# Altium PCB 【tb7152677】dengyuxiang v3.0.PcbDoc (part 1 of 2)
Units mm, origin at the board's own origin, x right, y up, seen from the top; angles counter-clockwise.
Board outline 152.4 x 101.6 mm, 2 copper layers (Top Layer, Bottom Layer); 58 components, 46 nets, 215 pads, 61 vias.
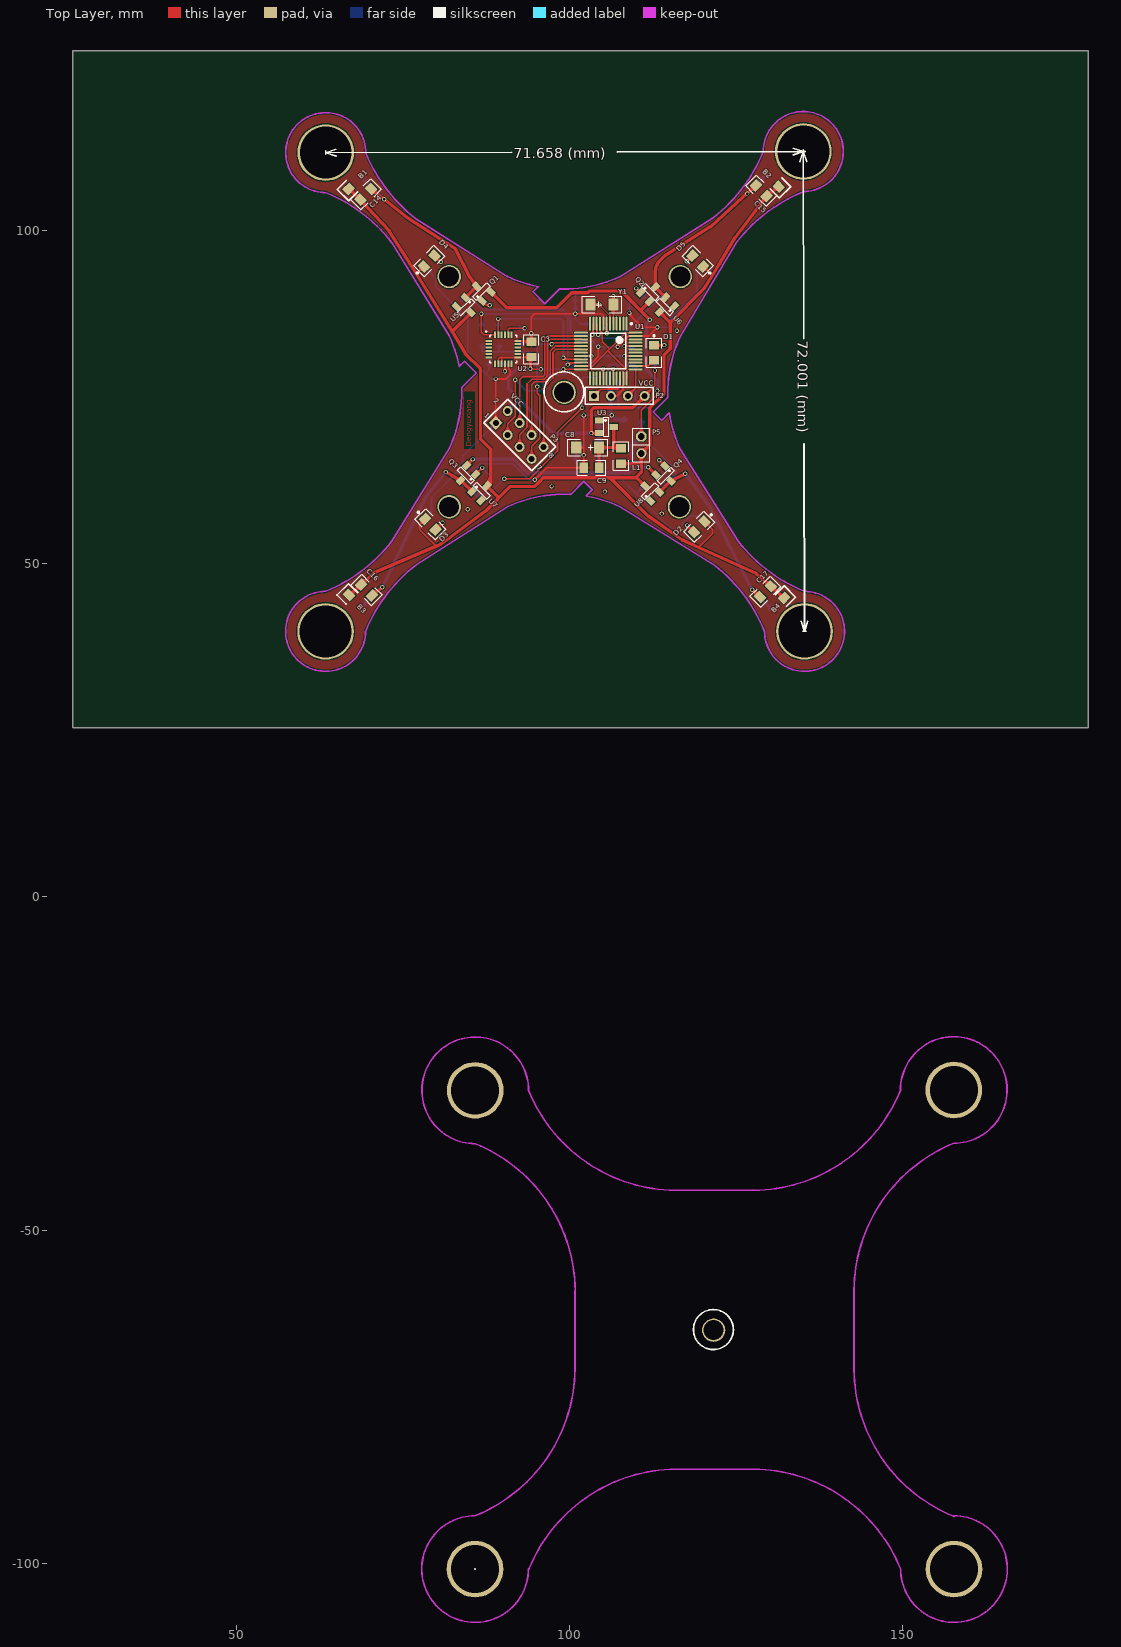
[diagram p0: Top Layer view]
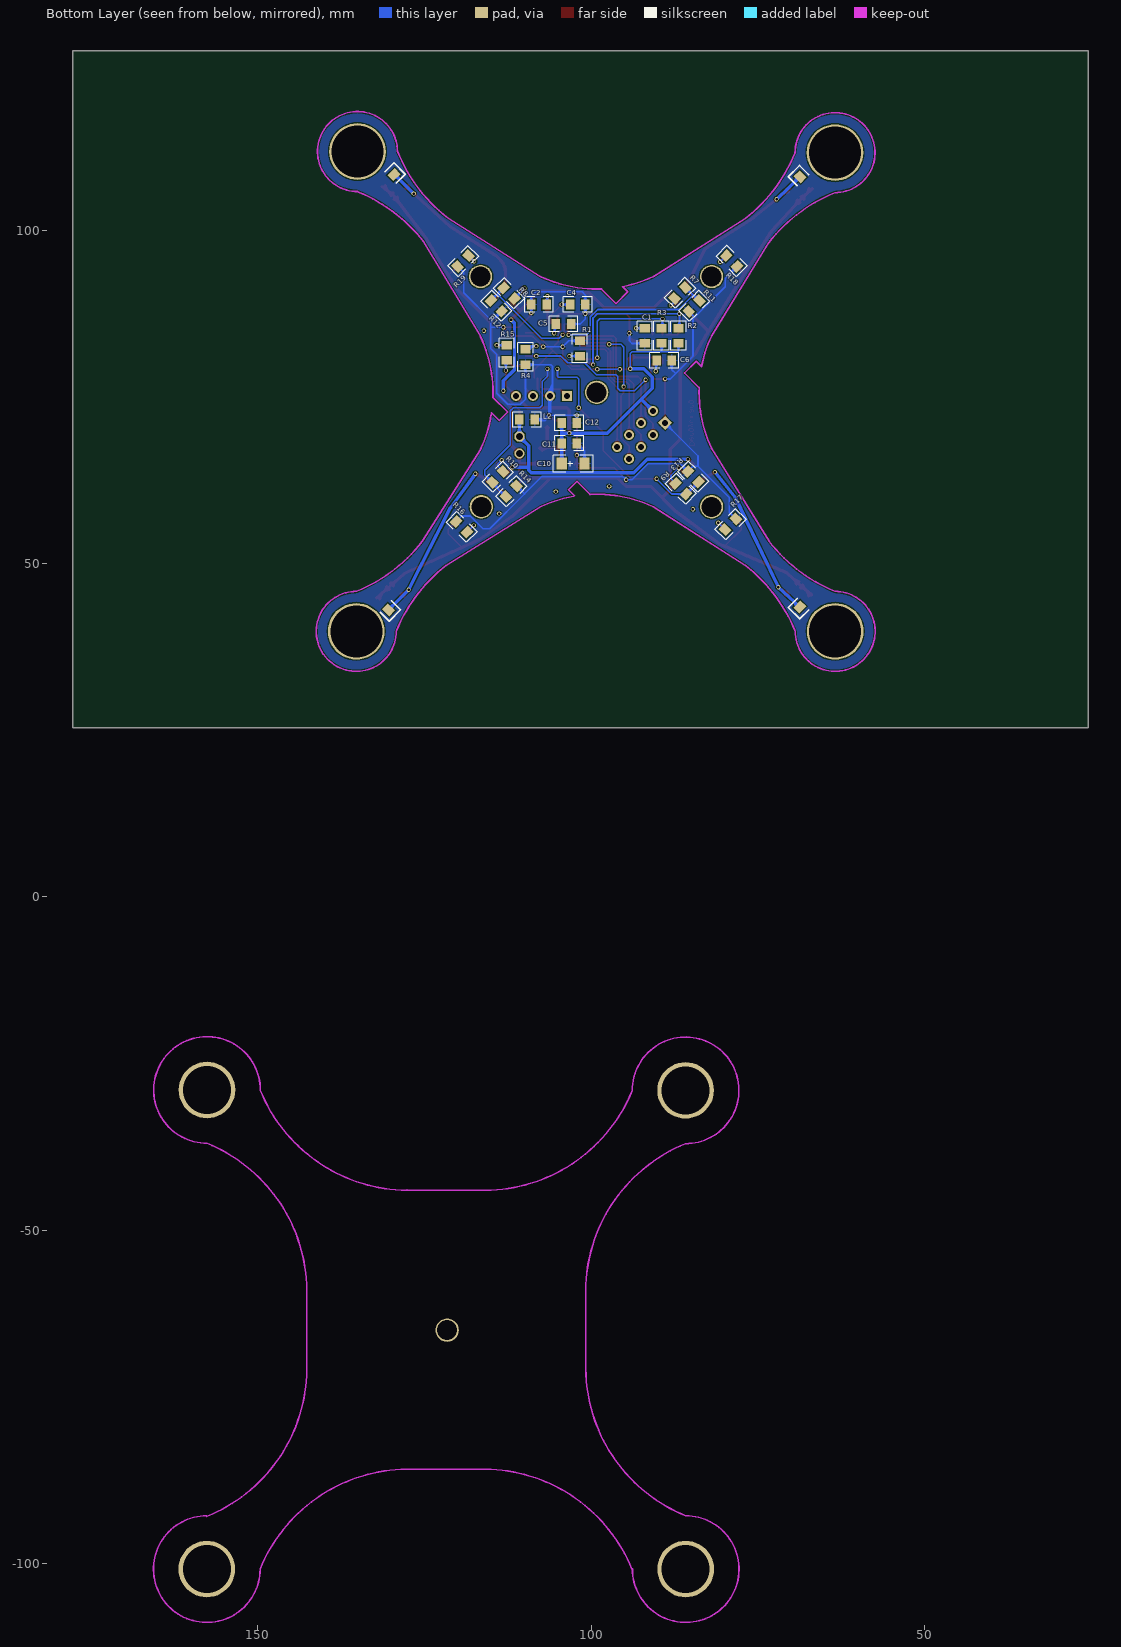
[diagram p1: Bottom Layer view, seen from below]

## Layer stack, top to bottom
Top Layer: signal copper 0.0356
Dielectric: dielectric 0.32, FR-4, Dk 4.8
Bottom Layer: signal copper 0.0356

## Board outline
25.4,25.4 177.8,25.4 177.8,127 25.4,127

## Design rules (kind name [scope] priority, off if disabled: settings)
Clearance Clearance_1 [OnLayer('Keep-Out Layer')] p1 off: gap=0.508
Clearance [All] p2: gap=0.152
ComponentClearance [All] p1: gap=0 collisioncheckmode=3 verticalgap=0 showdistances=FALSE
MinimumSolderMaskSliver [All] p1: minsoldermaskwidth=0.102
PolygonConnect [All] p1: connectstyle=Relief reliefconductorwidth=0.254 reliefentries=4 polygonreliefangle="90 Angle"
RoutingVias [All] p1: holewidth=0.711 width=1.27 viastyle="Through Hole" minholewidth=0.711 minwidth=1.27 maxholewidth=0.711 maxwidth=1.27
SilkToSilkClearance [All] p1: silktosilkclearance=0
SilkscreenOverComponentPads [All] p1: minsilkscreentomaskgap=0.102
SolderMaskExpansion [All] p1: expansion=0.102
Width [All] p1: maxlimit=2.54 minlimit=0.254 preferedwidth=0.254 minimp=50.000000 maximp=50.000000 favimp=50.000000
24 further rules are at their usual default settings.

## Components (designator, comment, footprint, x,y, rotation, side; value= is the part's Value field where it differs from the comment)
B1 "Motor" 0805_Motor 67.818,107.061 r45 top
B2 "Motor" 0805_Motor 130.556,107.569 r135 top
B3 "Motor" 0805_Motor 67.691,44.323 r315 top
B4 "Motor" 0805_Motor 131.191,44.069 r225 top
C1 "Cap" 0805_c 91.948,83.058 r90 bottom
C2 "Cap" 0805_c 106.68,88.9 r0 bottom
C3 "Cap" 0805_c 94.234,81.026 r90 top
C4 "Cap" 0805_c 103.124,88.9 r180 bottom
C5 "Cap" 0805_c 105.283,85.979 r180 bottom
C6 "Cap" 0805_c 90.17,80.518 r180 bottom
C8 "100uF" 1206_c 104.394,67.437 r180 top
C9 "Cap" 0805_c 104.394,64.389 r180 top
C10 "100uF" 1206_c 104.394,65.024 r180 bottom
C11 "Cap" 0805_c 104.394,68.072 r180 bottom
C12 "Cap" 0805_c 104.394,71.12 r180 bottom
C14 "104" 0805_c 68.58,104.648 r45 top
C15 "104" 0805_c 129.54,105.156 r135 top
C16 "104" 0805_c 68.707,46.863 r315 top
C17 "104" 0805_c 130.175,46.609 r225 top
D1 "LED" 0805_led 112.649,82.804 r270 top
D2 "LED" 0805_led 120.23,56.344 r225 top
D3 "LED" 0805_led 78.276,56.73 r315 top
D4 "LED" 0805_led 78.105,94.615 r45 top
D5 "LED" 0805_led 120.015,94.615 r135 top
L1 "Inductor" 0805_r 107.696,65.024 r90 top
L2 "Inductor" 0805_r 110.744,71.628 r180 bottom
P2 "Header 4" HDR1X4 103.632,75.184 r0 top
P3 "Header 4X2" HDR2X4 88.9,71.12 r315 top
P5 "Header 2" sip_2 110.744,69.088 r270 top
Q1 "SI2302" sot23 86.868,89.408 r45 top
Q2 "SI2302" sot23 110.617,90.678 r315 top
Q3 "SI2302" sot23 85.852,63.373 r135 top
Q4 "SI2302" sot23 114.3,64.643 r225 top
R1 "Res2" 0805_r 101.691,81.165 r90 bottom
R2 "Res2" 0805_r 86.868,85.334 r270 bottom
R3 "Res2" 0805_r 89.408,85.334 r270 bottom
R4 "Res2" 0805_r 109.855,79.883 r90 bottom
R7 "Res2" 0805_r 85.852,91.44 r315 bottom
R8 "Res2" 0805_r 113.116,91.399 r225 bottom
R9 "Res2" 0805_r 85.725,60.452 r45 bottom
R10 "Res2" 0805_r 114.808,62.23 r135 bottom
R11 "Res2" 0805_r 85.344,87.884 r135 bottom
R12 "Res2" 0805_r 113.411,87.884 r45 bottom
R13 "Res2" 0805_r 85.476,63.874 r225 bottom
R14 "Res2" 0805_r 111.166,61.681 r315 bottom
R15 "Res2" 0805_r 112.649,82.804 r270 bottom
R16 "RES2" 0805_r 120.228,56.347 r225 bottom
R17 "RES2" 0805_r 78.273,56.728 r315 bottom
R18 "RES2" 0805_r 78.105,94.615 r45 bottom
R19 "RES2" 0805_r 120.015,94.615 r135 bottom
U1 "STM32F101C6T6" LQFP48_M 105.791,81.915 r270 top
U2 "mpu6050" "24 Lead QFN" 87.63,80.518 r0 top
U3 "ME6206A33" sot23 104.394,71.501 r270 top
U5 "BAT54C" sot23 84.328,89.916 r225 top
U6 "BAT54C" sot23 115.697,88.646 r135 top
U7 "BAT54C" sot23 85.344,60.833 r315 top
U8 "BAT54C" sot23 112.141,59.436 r45 top
Y1 "XTAL" 1206_c 103.124,88.9 r0 top

## Footprints (in the part's own frame and the unit in brackets; to place one, negate y for a bottom-side part, rotate by r counter-clockwise, add the part's x,y. Pads: shape width x height; smd on the part's side, far side on the other; paste and mask are expansions set on the pad)
"24 Lead QFN" [mm]
  rect 0.95x0.3 smd: 1(0.228,2.932) 2(0.228,2.432) 3(0.228,1.932) 4(0.228,1.432) 5(0.228,0.932) 6(0.228,0.432) 13(4.578,0.432) 14(4.578,0.932) 15(4.578,1.432) 16(4.578,1.932) 17(4.578,2.432) 18(4.578,2.932)
  rect 0.3x0.95 smd: 7(1.153,-0.493) 8(1.653,-0.493) 9(2.153,-0.493) 10(2.653,-0.493) 11(3.153,-0.493) 12(3.653,-0.493) 19(3.653,3.857) 20(3.153,3.857) 21(2.653,3.857) 22(2.153,3.857) 23(1.653,3.857) 24(1.153,3.857)
  silkscreen extent -0.23,-0.37 4.45,4.37, body extent 0.38,-0.38 4.44,3.68, height 0.89
0805_c [mil]
  rect 50x60 smd: 1(-0.19,-0.27) 2(89.81,-0.27)
  silkscreen extent -40,-45 130,45
0805_led [mil]
  rect 50x60 smd: 1(-0.19,0.11) 2(89.81,0.11)
  silkscreen extent -60,-45 130,45
0805_Motor [mil]
  rect 60x50 smd: 1(-50,5)
  rect 60x50 smd far side: 2(50,5)
  silkscreen extent -100,-45 -25,50
0805_r [mil]
  rect 50x60 smd: 1(-0.19,-0.27) 2(89.81,-0.27)
  silkscreen extent -40,-45 130,45
1206_c [mil]
  rect 60x70 smd: 1(-0.19,-0.27) 2(134.81,-0.27)
  silkscreen extent -50,-50 185,50
HDR1X4 [mm] "Connector; Header; 4 Position"
  rect 1.5x1.5 hole 0.9: 1(0,0)
  round 1.5 hole 0.9: 2(2.54,0) 3(5.08,0) 4(7.62,0)
  silkscreen extent -1.27,-1.27 8.89,1.27
HDR2X4 [mm] "Connector; Header; 4x2 Position"
  rect 1.5x1.5 hole 0.9: 1(0,0)
  round 1.5 hole 0.9: 2(0,2.54) 3(2.54,0) 4(2.54,2.54) 5(5.08,0) 6(5.08,2.54) 7(7.62,0) 8(7.62,2.54)
  silkscreen extent -1.27,-1.27 8.89,3.81
LQFP48_M [mm] "Thin QFP, 48-Leads, Body 7x7mm, Pitch 0.5mm, IPC Low De"
  oval 2.1x0.3 smd: 1(-4.1,2.75) 2(-4.1,2.25) 3(-4.1,1.75) 4(-4.1,1.25) 5(-4.1,0.75) 6(-4.1,0.25) 7(-4.1,-0.25) 8(-4.1,-0.75) 9(-4.1,-1.25) 10(-4.1,-1.75) 11(-4.1,-2.25) 12(-4.1,-2.75) 25(4.1,-2.75) 26(4.1,-2.25) 27(4.1,-1.75) 28(4.1,-1.25) 29(4.1,-0.75) 30(4.1,-0.25) 31(4.1,0.25) 32(4.1,0.75) 33(4.1,1.25) 34(4.1,1.75) 35(4.1,2.25) 36(4.1,2.75)
  oval 0.3x2.1 smd: 13(-2.75,-4.1) 14(-2.25,-4.1) 15(-1.75,-4.1) 16(-1.25,-4.1) 17(-0.75,-4.1) 18(-0.25,-4.1) 19(0.25,-4.1) 20(0.75,-4.1) 21(1.25,-4.1) 22(1.75,-4.1) 23(2.25,-4.1) 24(2.75,-4.1) 37(2.75,4.1) 38(2.25,4.1) 39(1.75,4.1) 40(1.25,4.1) 41(0.75,4.1) 42(0.25,4.1) 43(-0.25,4.1) 44(-0.75,4.1) 45(-1.25,4.1) 46(-1.75,4.1) 47(-2.25,4.1) 48(-2.75,4.1)
  silkscreen extent -4.22,-2.65 2.65,3.57, body extent -3.5,-3.5 3.5,3.5, height 1.6
sip_2 [mil]
  oct 60x60 hole 40: 1(0,0)
  round 60 hole 40: 2(100,0)
  silkscreen extent -50,-50 150,50
sot23 [mil]
  rect 36x50 smd: 1(-0.2,0) 2(74.8,0) 3(37.8,86)
  silkscreen extent -20,28 94,58

## Part data
B1 B2 B3 B4: "Motor, Genera"
C1 C2 C3 C4 C5 C6 C9 C11 C12: "Capacitor"
C8 C10: library part "CAPACITOR POL", "Capacitor"
C14 C15 C16 C17: library part CAP, "Capacitor"
D1: library part LED0, "Typical INFRARED GaAs LED"
P2: "Header, 4-Pin"
P3: "Header, 4-Pin, Dual row"
P5: "Header, 2-Pin"
R1 R2 R3 R4 R7 R8 R9 R10 R11 R12 R13 R14 R15: "Resistor"
U1: "STM32 ARM-based 32-bit MCU with 32 Kbytes Flash, 48-pin LQFP, Industrial Temperature"
U2: library part m
U3: library part ME6206Axx
Y1: "Crystal Oscillator"

## Free pads (board coordinates)
  round 8.5 hole 7.8: 1(63.388,111.688) 2(135.046,111.853) 3(63.365,39.853) 4(135.23,39.853)
  round 8.5 hole 7.2: 1(85.817,-29.028) 2(157.63,-28.965) 3(85.794,-100.863) 4(157.658,-100.863)
  round 3.5 hole 3: 5(99.162,75.711) 5(121.59,-65.005) 6(81.915,93.091) 7(116.586,93.091) 8(81.915,58.547) 9(116.459,58.547)

## Via types
v1: diameter 0.635, hole 0.381, Top Layer to Bottom Layer, 61 vias

## Nets (pads, with @x,y where several pads share a name; then routed paths per layer and width w, separated by ;. In a path a pad name is that pad's centre, name@x,y a point inside that pad or via, vN(x,y) a via of type N, cw(c..) or ccw(c..) an arc to the next point about the centre after c; other vN are vias at no path point)
AD: U1.19
AUX_CL: U2.7
AUX_DA: U2.6
GND: C1.1 C2.2 C3.2 C4.2 C5.2 C6.2 C8.2 C9.2 C10.2 C11.2 C12.2 L2.2 P2.2 P3.1 R1.2 R4.1 R11.1 R12.1 R13.1 R14.1 R16.1 R17.1 R18.1 R19.1 U1.8 U1.23 U1.35 U1.47 U2.11 U2.18 U3.1 | length 331.6
  Top Layer w0.254: P3.1@88.459,71.561 ccw(c87.396,72.624) 88.9,72.624 ccw(c90.404,72.624) P3.1@89.341,71.561 ; P3.1@88.639,71.381 ccw(c88.009,72.011) 88.9,72.011 ccw(c89.791,72.011) P3.1@89.161,71.381 ; v1@88.765,77.589 cw(c88.44,77.264) 88.9,77.264 cw(c89.36,77.264) 89.035,77.589 cw(c89.36,77.264) 89.36,77.724 cw(c89.36,78.184) v1@89.035,77.859 ; P3.1@88.9,71.12 v1(88.9,77.724) 90.424,77.724 91.059,78.359 91.059,78.994 90.783,79.27 U2.11@90.783,80.025 ; U2.18@92.208,83.45 C3.2@94.118,83.45 ; U2.18@92.543,83.45 cw(c92.543,81.736) C3.2@93.755,82.948 ; 93.156,83.45 cw(c93.156,82.349) C3.2@93.934,83.128 ; 93.232,83.45 ccw(c93.232,84.189) C3.2@93.755,83.666 ; C3.2@93.882,83.666 ccw(c93.031,84.517) v1@94.234,84.517 ; v1@94.099,84.447 cw(c93.774,84.122) 94.234,84.122 cw(c94.694,84.122) v1@94.369,84.447 ; v1@94.099,84.717 ccw(c93.774,85.042) 94.234,85.042 ccw(c94.694,85.042) v1@94.369,84.717 ; C3.2@94.234,83.314 v1(94.234,84.582) 94.234,86.995 94.742,87.503 v1(100.838,87.503) 104.775,87.503 105.041,87.237 U1.8@105.041,86.015 ; v1@94.234,84.55 ccw(c95.484,84.55) C3.2@94.6,83.666 ; v1(94.742,62.611) 96.527,64.396 C9.2@102.113,64.396 v1(102.113,66.301) v1(102.113,72.258) ; v1@94.742,62.801 ccw(c94.742,63.261) 95.067,62.936 ccw(c95.392,62.611) v1@94.932,62.611 ; v1@100.703,87.368 ccw(c100.378,87.043) 100.378,87.503 ccw(c100.378,87.963) v1@100.703,87.638 ; C8.2@100.97,67.444 102.106,67.444 ; v1@100.973,87.368 cw(c101.298,87.043) 101.298,87.503 cw(c101.298,87.963) v1@100.973,87.638 ; C8.2@101.511,67.111 cw(c102.106,66.745) 102.106,67.444 ; C8.2@101.511,67.777 ccw(c102.106,68.143) 102.106,67.444 ; U1.23@101.691,79.665 102.863,79.665 104.267,81.069 v1(104.267,82.55) ; C9.2@101.754,64.037 ccw(c100.886,63.169) 100.886,64.396 ccw(c100.886,65.622) C9.2@101.754,64.755 ; C9.2@101.754,64.882 ccw(c100.886,65.749) 102.113,65.749 ccw(c103.339,65.749) C9.2@102.472,64.882 ; v1@101.978,66.166 cw(c101.653,65.841) 102.113,65.841 cw(c102.573,65.841) v1@102.248,66.166 ; v1@101.978,66.436 ccw(c101.653,66.761) 102.113,66.761 ccw(c102.573,66.761) v1@102.248,66.436 ; v1@101.978,72.123 cw(c101.653,71.798) 102.113,71.798 cw(c102.573,71.798) v1@102.248,72.123 ; U1.23@102.591,79.688 ccw(c102.591,80.399) 103.094,79.896 ; v1@104.132,82.415 cw(c103.807,82.09) 104.267,82.09 cw(c104.727,82.09) v1@104.402,82.415 ; U3.1@104.394,71.506 105.542,71.506 v1(106.299,72.263) ; U3.1@104.805,71.273 cw(c105.369,70.709) 105.369,71.506 cw(c105.369,72.303) U3.1@104.805,71.74 ; v1@106.108,72.263 cw(c105.649,72.263) 105.974,71.938 cw(c106.299,71.613) v1@106.299,72.072 ; P2.2@106.172,75.184 107.061,75.184 ; P2.2@106.758,74.971 cw(c107.061,74.861) 107.061,75.184 ; P2.2@106.758,75.397 ccw(c107.061,75.507) 107.061,75.184 ; v1(107.188,82.55) 108.803,84.165 U1.47@109.891,84.165 111.851,84.165 v1(113.157,85.471) 110.871,85.471 108.966,87.376 v1(108.966,87.63) ; v1@107.188,82.74 ccw(c107.188,83.2) 107.513,82.875 ccw(c107.838,82.55) v1@107.379,82.55 ; U1.35@108.041,77.815 108.041,76.164 107.061,75.184 ; 108.631,83.993 cw(c108.991,83.633) U1.47@108.991,84.142 ; 108.709,84.071 cw(c108.908,83.872) U1.47@108.985,84.143 ; v1@108.902,87.63 ccw(c109.362,87.63) 109.037,87.305 ; v1@109.156,87.63 ccw(c110.23,87.63) 109.471,86.871 ; v1@112.966,85.471 cw(c112.507,85.471) 112.832,85.146 cw(c113.157,84.821) v1@113.157,85.281 ; v1@113.022,85.336 ccw(c112.697,85.011) 112.697,85.471 ccw(c112.697,85.931) v1@113.022,85.606
  Bottom Layer w0.254: R18.1@78.097,94.616 79.886,92.828 79.886,91.564 84.709,86.741 84.709,81.153 87.312,78.549 ; R18.1@78.187,94.019 cw(c78.187,92.792) 79.054,93.659 cw(c79.921,94.527) R18.1@78.695,94.527 ; R17.1@78.275,56.736 79.248,57.709 79.248,59.944 83.947,64.643 ; 84.462,86.995 R11.1@85.343,87.876 ; R13.1@85.484,64.381 ccw(c85.484,65.607) 86.351,64.74 ccw(c87.219,63.873) R13.1@85.992,63.873 ; C6.2@87.53,80.025 cw(c86.662,79.158) 87.889,79.158 cw(c89.115,79.158) C6.2@88.248,80.025 ; C6.2@87.889,80.511 87.889,79.126 87.312,78.549 ; P3.1@88.277,71.12 cw(c86.773,71.12) 87.836,70.056 cw(c88.9,68.993) P3.1@88.9,70.497 ; P3.1@88.531,71.12 cw(c87.64,71.12) 88.27,70.49 cw(c88.9,69.86) P3.1@88.9,70.751 ; v1@88.765,77.589 ccw(c88.44,77.264) 88.44,77.724 ccw(c88.44,78.184) v1@88.765,77.859 ; P3.1@88.9,71.12 83.947,66.167 83.947,64.643 ; v1(88.9,77.724) 88.138,77.724 87.312,78.549 ; C1.1@91.941,83.053 93.848,83.053 94.234,83.439 v1(94.234,84.582) ; C1.1@92.427,82.694 cw(c93.295,81.827) 93.295,83.053 cw(c93.295,84.28) C1.1@92.427,83.412 ; v1@94.099,84.447 cw(c93.774,84.122) 94.234,84.122 cw(c94.694,84.122) v1@94.369,84.447 ; v1@94.607,62.476 ccw(c94.282,62.151) 94.282,62.611 ccw(c94.282,63.071) v1@94.607,62.746 ; v1@94.742,62.801 ccw(c94.742,63.261) 95.067,62.936 ccw(c95.392,62.611) v1@94.932,62.611 ; C4.2@100.484,88.407 cw(c99.567,87.49) v1@100.863,87.49 ; C4.2@100.484,89.379 ccw(c99.616,90.247) 100.843,90.247 ccw(c102.069,90.247) C4.2@101.202,89.379 ; C10.2@100.521,65.593 ccw(c99.437,66.677) 100.97,66.677 ccw(c102.503,66.677) C10.2@101.419,65.593 ; C4.2@100.663,88.587 cw(c100.18,88.103) 100.863,88.103 ; C10.2@100.7,65.414 ccw(c100.05,66.064) 100.97,66.064 ccw(c101.89,66.064) C10.2@101.239,65.414 ; v1@100.703,87.368 cw(c100.317,86.982) 100.863,86.982 ; v1@100.703,87.638 ccw(c100.317,88.024) 100.863,88.024 ; 100.863,87.104 cw(c101.237,87.104) v1@100.973,87.368 ; v1@100.863,87.589 cw(c102.02,87.589) C4.2@101.202,88.407 ; 100.863,87.902 ccw(c101.237,87.902) v1@100.973,87.638 ; C10.2@100.97,65.017 100.97,66.922 C11.2@102.113,68.065 ; 100.977,66.301 v1(102.113,66.301) ; 101.029,66.981 cw(c102.113,65.897) C11.2@102.113,67.43 ; 101.335,67.288 ccw(c100.685,67.938) C11.2@101.605,67.938 ; 101.462,67.415 cw(c102.113,66.764) C11.2@102.113,67.684 ; R1.2@101.684,83.446 103.371,83.446 v1(104.267,82.55) v1(107.188,82.55) ; C12.2@101.807,71.646 ccw(c101.347,72.258) v1(102.113,72.258) ; v1@101.978,66.166 ccw(c101.653,65.841) 101.653,66.301 ccw(c101.653,66.761) v1@101.978,66.436 ; v1@101.978,72.123 cw(c101.653,71.798) 102.113,71.798 cw(c102.573,71.798) 102.248,72.123 cw(c102.573,71.798) 102.573,72.258 cw(c102.573,72.718) v1@102.248,72.393 ; C12.2@102.113,71.113 v1(102.113,72.258) ; R1.2@102.17,83.087 cw(c103.038,82.22) 103.038,83.446 cw(c103.038,84.673) R1.2@102.17,83.805 ; C12.2@102.418,71.646 cw(c102.879,72.258) v1(102.113,72.258) ; C5.2@102.643,85.613 ccw(c101.775,84.746) 101.775,85.972 ccw(c101.775,87.199) C5.2@102.643,86.331 ; C5.2@103.002,85.972 101.607,85.972 100.863,86.716 100.863,88.873 C4.2@100.843,88.893 100.843,90.302 101.346,90.805 108.204,90.805 108.966,90.043 ; v1@104.076,82.55 ccw(c103.617,82.55) 103.942,82.875 ccw(c104.267,83.2) v1@104.267,82.74 ; v1@104.402,82.415 cw(c104.727,82.09) 104.727,82.55 cw(c104.727,83.01) v1@104.402,82.685 ; 105.791,76.381 ccw(c107.369,76.381) P2.2@106.253,75.265 ; 105.791,76.995 ccw(c107.983,76.995) P2.2@106.433,75.445 ; 105.791,77.608 ccw(c108.596,77.608) P2.2@106.613,75.625 ; 105.827,72.258 ccw(c105.827,72.735) v1@106.164,72.398 ; 105.851,72.258 cw(c105.851,71.815) v1@106.164,72.128 ; P2.2@106.172,75.184 105.791,75.565 105.791,79.629 106.04,79.878 R4.1@109.848,79.878 109.848,74.683 110.617,73.914 112.522,73.914 114.173,75.565 114.173,81.407 115.062,82.296 115.062,85.471 ; v1@106.304,72.258 v1(102.113,72.258) ; v1@107.053,82.415 ccw(c106.728,82.09) 106.728,82.55 ccw(c106.728,83.01) v1@107.053,82.685 ; C2.2@108.622,88.402 cw(c107.929,87.63) v1(108.966,87.63) ; C2.2@108.662,89.444 ccw(c108.225,90.043) 108.966,90.043 ; v1@108.831,87.765 ccw(c108.506,88.09) 108.966,88.09 ccw(c109.426,88.09) v1@109.101,87.765 ; C2.2@108.961,88.907 C2.2@108.966,88.902 ; C2.2@109.267,89.44 cw(c109.721,90.043) 108.966,90.043 ; C2.2@109.306,88.407 ccw(c110.023,87.63) v1(108.966,87.63) ; R4.1@109.362,79.519 ccw(c108.495,78.652) 108.495,79.878 ccw(c108.495,81.105) R4.1@109.362,80.237 ; R4.1@109.489,79.519 cw(c108.622,78.652) 109.848,78.652 cw(c111.075,78.652) R4.1@110.207,79.519 ; 109.982,60.452 115.189,55.245 116.205,55.245 118.11,57.15 119.431,57.15 R16.1@120.236,56.345 ; R14.1@110.57,61.599 cw(c109.344,61.599) 110.211,60.732 cw(c111.078,59.865) R14.1@111.078,61.091 ; R14.1@111.168,61.689 109.982,60.503 107.391,63.094 95.225,63.094 v1(94.742,62.611) 93.861,62.611 91.448,65.024 86.635,65.024 R13.1@85.484,63.873 84.714,64.643 83.947,64.643 ; v1(113.157,85.471) 115.062,85.471 ; v1@113.292,85.336 cw(c113.617,85.011) 113.617,85.471 cw(c113.617,85.931) v1@113.292,85.606 ; R12.1@113.403,87.885 114.868,86.42 ; R12.1@113.493,87.288 cw(c113.493,86.061) 114.36,86.928 cw(c115.227,87.796) R12.1@114.001,87.796 ; R19.1@120.014,94.607 119.126,93.719 119.126,90.678 114.868,86.42 ; v1(108.966,87.63) C2.2@108.966,88.902 ; C2.2@108.966,88.902 108.966,90.043 ; 114.868,86.42 115.062,86.226 115.062,85.471
  Bottom Layer w0.508: P2.2@105.821,74.833 cw(c104.975,73.987) 106.172,73.987 cw(c107.369,73.987) P2.2@106.523,74.833 ; 106.172,72.723 ccw(c106.759,72.723) v1@106.344,72.308 ; P2.2@106.172,75.184 106.172,72.39 v1(106.299,72.263) 106.304,72.258 106.941,71.621 L2.2@108.463,71.621 ; L2.2@108.193,71.352 ccw(c107.543,70.701) 107.543,71.621 ccw(c107.543,72.541) L2.2@108.193,71.891
  other v1: 113.792,57.531 84.709,58.166 105.283,60.833 97.282,61.595 116.078,84.963
INT: U2.12
LED1: D1.2 U1.38 | length 4.6
  Top Layer w0.254: U1.38@109.891,79.665 111.794,79.665 D1.2@112.652,80.523 ; 111.858,79.729 ccw(c111.374,80.212) D1.2@112.034,80.391 ; 111.874,79.745 cw(c112.525,79.095) D1.2@112.525,80.015
MISO: P3.7 U1.16 | length 30.3
  Top Layer w0.254: P3.7@93.848,66.172 ccw(c92.784,67.236) 94.288,67.236 ccw(c95.792,67.236) P3.7@94.729,66.172 ; P3.7@94.027,65.993 ccw(c93.397,66.623) 94.288,66.623 ccw(c95.179,66.623) P3.7@94.549,65.993 ; P3.7@94.288,65.732 94.288,67.618 95.504,68.834 95.504,75.184 95.123,75.565 v1(95.123,76.581) ; v1@94.988,76.446 cw(c94.663,76.121) 95.123,76.121 cw(c95.583,76.121) v1@95.258,76.446 ; v1(97.282,82.931) 97.516,83.165 U1.16@101.691,83.165
  Bottom Layer w0.254: v1@94.988,76.716 ccw(c94.772,76.932) 95.078,76.932 ; 95.078,77.149 ccw(c95.691,77.149) v1@95.258,76.716 ; v1(95.123,76.581) 95.078,76.626 95.078,82.505 95.504,82.931 v1(97.282,82.931) ; v1@97.147,82.796 ccw(c96.822,82.471) 96.822,82.931 ccw(c96.822,83.391) v1@97.147,83.066
MOSI: P3.6 U1.17 | length 23.4
  Top Layer w0.254: P3.6@93.848,69.764 ccw(c92.784,70.828) 94.288,70.828 ccw(c95.792,70.828) P3.6@94.729,69.764 ; P3.6@94.027,69.585 ccw(c93.397,70.215) 94.288,70.215 ccw(c95.179,70.215) P3.6@94.549,69.585 ; P3.6@94.288,69.324 94.288,76.838 94.742,77.292 96.349,77.292 97.085,78.028 97.085,79.749 97.079,79.755 97.079,81.915 97.498,82.334 97.529,82.334 97.86,82.665 U1.17@101.691,82.665
NetB1_2: B1.2 C14.2 Q1.3 U5.1 | length 33.5
  Top Layer w0.508: C14.2@70.198,106.256 v1(72.158,104.695) 75.565,101.981 82.804,97.282 84.963,93.091 Q1.3@86.002,91.632 cw(c85.903,91.632) 85.973,91.561 U5.1@84.332,89.92 ; C14.2@70.331,105.788 cw(c70.44,104.825) 71.043,105.583 ; C14.2@70.666,106.209 ccw(c71.532,106.307) 70.989,105.626 ; U5.1@84.332,90.123 ccw(c84.332,90.613) 84.678,90.266 ccw(c85.025,89.92) U5.1@84.535,89.92 ; 85.575,92.232 cw(c85.093,91.889) Q1.3@85.676,91.791 ; 85.626,91.214 ccw(c85.209,91.632) Q1.3@85.799,91.632
  Bottom Layer w0.508: B1.2@68.626,108.049 v1(72.158,104.695) ; B1.2@69.097,108.148 ccw(c70.45,108.183) 69.518,107.202
NetB2_2: B2.2 C15.2 Q2.3 U6.2 | length 33.7
  Top Layer w0.508: 112.841,92.463 ccw(c113.76,92.463) Q2.3@113.11,91.813 ; Q2.3@113.044,91.544 ccw(c113.634,91.544) 113.217,91.126 ; U6.2@114.15,89.99 ccw(c113.66,89.99) 114.007,90.336 ccw(c114.353,90.683) U6.2@114.353,90.193 ; U6.2@114.353,89.99 112.841,91.502 Q2.3@112.841,91.544 112.841,93.754 cw(c115.381,93.754) 113.585,95.551 114.3,96.266 121.158,100.584 C15.2@127.932,106.774 ; 127.149,106.058 cw(c127.783,105.365) C15.2@127.825,106.303 ; 127.169,106.077 ccw(c126.562,106.742) C15.2@127.461,106.701
  Bottom Layer w0.508: v1(126.619,105.537) 129.459,108.377 B2.2@129.568,108.377 ; 128.778,107.696 ccw(c128.007,108.467) B2.2@129.097,108.467 ; 128.949,107.867 cw(c129.478,107.337) B2.2@129.478,108.086
NetB3_2: B3.2 C16.2 Q3.3 U7.1 | length 35.7
  Top Layer w0.508: C16.2@70.315,45.245 v1(71.882,46.482) ; C16.2@70.449,45.713 ccw(c70.563,46.677) 71.164,45.915 ; C16.2@70.783,45.29 cw(c71.646,45.189) 71.108,45.871 ; v1(81.407,63.754) Q3.3@83.628,62.507 83.67,62.507 U7.1@85.34,60.837 ; 82.798,62.973 cw(c82.272,62.036) Q3.3@83.307,62.327 ; Q3.3@83.628,62.304 cw(c83.628,61.714) 84.046,62.131 ; U7.1@85.137,60.837 ccw(c84.647,60.837) 84.994,61.183 ccw(c85.34,61.53) U7.1@85.34,61.04
  Bottom Layer w0.508: B3.2@68.679,43.515 v1(71.882,46.482) 78.356,59.947 v1(81.407,63.754) ; B3.2@69.149,43.41 cw(c70.501,43.359) 69.582,44.351
NetB4_2: B4.2 C17.2 Q4.3 U8.2 | length 35.8
  Top Layer w0.508: U8.2@113.485,60.78 113.526,60.78 Q4.3@115.166,62.419 v1(117.348,63.5) ; U8.2@113.485,60.983 ccw(c113.485,61.573) 113.902,61.156 ; Q4.3@114.962,62.419 cw(c114.472,62.419) 114.819,62.073 cw(c115.166,61.726) Q4.3@115.166,62.216 ; Q4.3@115.484,62.229 cw(c116.494,61.888) 116.021,62.843 ; v1(127.381,46.101) C17.2@128.557,45.001 ; 127.785,45.723 ccw(c128.423,46.405) C17.2@128.455,45.471 ; 127.8,45.709 cw(c127.182,45.048) C17.2@128.087,45.078
  Bottom Layer w0.508: v1(117.348,63.5) 121.061,58.42 v1(127.381,46.101) B4.2@130.383,43.081 ; B4.2@130.002,43.082 ccw(c129.082,43.085) 129.734,43.734 ccw(c130.387,44.382) B4.2@130.384,43.462
NetC1_2: C1.2 U2.20 | length 7.8
  Top Layer w0.254: U2.20@90.783,84.375 90.783,85.195 90.932,85.344 v1(93.218,85.344) ; v1@93.083,85.209 ccw(c92.758,84.884) 92.758,85.344 ccw(c92.758,85.804) v1@93.083,85.479
  Bottom Layer w0.254: C1.2@91.946,85.344 v1(93.218,85.344) ; C1.2@92.441,85.684 ccw(c93.218,86.401) v1(93.218,85.344) ; C1.2@92.446,85 cw(c93.218,84.307) v1(93.218,85.344) ; v1@93.083,85.209 ccw(c92.758,84.884) 92.758,85.344 ccw(c92.758,85.804) v1@93.083,85.479
NetC2_1: C2.1 U1.5 Y1.2 | length 14
  Top Layer w0.254: Y1.2@106.099,88.317 cw(c105.032,87.25) 106.541,87.25 ; Y1.2@106.212,89.559 ccw(c105.833,90.165) v1(106.548,90.165) ; Y1.2@106.279,88.497 cw(c105.645,87.863) 106.541,87.863 ; v1@106.413,90.03 cw(c106.088,89.705) 106.548,89.705 cw(c107.008,89.705) v1@106.683,90.03 ; U1.5@106.541,86.015 Y1.2@106.541,88.886 ; 106.541,87.216 cw(c108.098,87.216) Y1.2@106.997,88.317 ; 106.541,87.829 cw(c107.485,87.829) Y1.2@106.818,88.497 ; Y1.2@106.548,88.893 v1(106.548,90.165) ; Y1.2@106.884,89.559 cw(c107.263,90.165) v1(106.548,90.165)
  Bottom Layer w0.254: C2.1@106.316,89.393 ccw(c105.755,89.954) v1@106.548,89.954 ; v1@106.413,90.03 cw(c106.088,89.705) 106.548,89.705 cw(c107.008,89.705) v1@106.683,90.03 ; C2.1@106.548,89.034 v1(106.548,90.165) ccw(c107.365,90.165) C2.1@106.94,89.468 ; 106.548,89.713 ccw(c107.089,89.713) C2.1@106.807,89.251
NetC4_1: C4.1 U1.6 Y1.1 | length 13.1
  Top Layer w0.254: Y1.1@103.119,88.893 v1@104.401,88.893 ; Y1.1@103.422,88.662 cw(c103.888,88.308) 103.888,88.893 cw(c103.888,89.479) Y1.1@103.422,89.124 ; Y1.1@103.624,88.508 cw(c104.401,87.917) v1@104.401,88.893 ; Y1.1@103.624,89.278 ccw(c104.401,89.869) v1@104.401,88.893 ; 103.918,88.893 ccw(c103.918,89.376) v1@104.259,89.035 ; 103.951,88.893 cw(c103.951,88.457) v1@104.259,88.765 ; v1@104.394,88.709 cw(c104.394,88.25) 104.719,88.575 cw(c105.044,88.9) v1@104.584,88.9 ; U1.6@106.041,86.015 106.041,87.253 v1@104.401,88.893
  Bottom Layer w0.254: C4.1@103.136,88.9 v1(104.394,88.9) ; C4.1@103.488,88.534 cw(c104.372,87.65) v1@104.372,88.9 ; C4.1@103.488,89.252 ccw(c104.339,90.103) v1@104.339,88.9 ; v1@104.259,88.765 ccw(c103.934,88.44) 103.934,88.9 ccw(c103.934,89.36) v1@104.259,89.035
NetC5_1: C5.1 U1.7 | length 6.1
  Top Layer w0.254: v1@105.406,84.721 ccw(c105.081,85.046) 105.541,85.046 ccw(c106.001,85.046) v1@105.676,84.721 ; v1(105.541,84.586) U1.7@105.541,86.015
  Bottom Layer w0.254: C5.1@105.044,85.4 cw(c104.585,84.561) v1@105.541,84.561 ; C5.1@105.166,85.622 cw(c104.82,84.989) 105.541,84.989 ; v1@105.406,84.721 ccw(c105.081,85.046) 105.541,85.046 ccw(c106.001,85.046) v1@105.676,84.721 ; v1(105.541,84.586) C5.1@105.541,85.719 ; C5.1@105.541,85.23 cw(c105.903,85.23) C5.1@105.647,85.486
NetC6_1: C6.1 U2.10 | length 6.1
  Top Layer w0.254: v1@90.148,79.016 ccw(c89.823,79.341) 90.283,79.341 ccw(c90.743,79.341) v1@90.418,79.016 ; v1(90.283,78.881) U2.10@90.283,80.025
  Bottom Layer w0.254: C6.1@89.865,79.982 cw(c89.207,79.13) v1@90.283,79.13 ; C6.1@90.02,80.183 cw(c89.606,79.647) 90.283,79.647 ; v1@90.148,79.016 ccw(c89.823,79.341) 90.283,79.341 ccw(c90.743,79.341) v1@90.418,79.016 ; v1@90.283,79.135 C6.1@90.283,80.403 ; 90.283,79.419 cw(c91.14,79.419) C6.1@90.534,80.025
NetD1_1: D1.1 R15.1 | length 8.3
  Top Layer w0.254: D1.1@112.652,82.809 v1(114.168,82.809) ; D1.1@113.138,82.45 cw(c114.005,81.582) 114.005,82.809 cw(c114.005,84.035) D1.1@113.138,83.168 ; v1@114.033,82.674 ccw(c113.708,82.349) 113.708,82.809 ccw(c113.708,83.269) v1@114.033,82.944
  Bottom Layer w0.254: R15.1@112.656,82.809 v1(114.168,82.809) ; R15.1@113.142,82.45 cw(c114.009,81.582) 114.009,82.809 cw(c114.009,84.035) R15.1@113.142,83.168 ; v1@114.033,82.674 ccw(c113.708,82.349) 113.708,82.809 ccw(c113.708,83.269) v1@114.033,82.944
NetD2_2: D2.2 R16.2 | length 6.2
  Top Layer w0.254: v1@117.602,55.556 cw(c117.602,55.096) 117.927,55.421 cw(c118.252,55.746) v1@117.792,55.746 ; v1(117.602,55.746) D2.2@118.619,54.729 ; D2.2@118.022,54.819 ccw(c116.795,54.819) 117.662,55.686 ccw(c118.53,56.553) D2.2@118.53,55.327
  Bottom Layer w0.254: v1@117.602,55.556 cw(c117.602,55.096) 117.927,55.421 cw(c118.252,55.746) v1@117.792,55.746 ; v1(117.602,55.746) R16.2@118.619,54.729
NetD3_2: D3.2 R17.2 | length 6.2
  Top Layer w0.254: D3.2@79.891,55.119 v1(80.906,56.134) ; D3.2@79.981,55.717 ccw(c79.981,56.944) 80.848,56.076 ccw(c81.716,55.209) D3.2@80.489,55.209 ; v1@80.715,56.134 cw(c80.255,56.134) 80.581,55.809 cw(c80.906,55.484) v1@80.906,55.944
  Bottom Layer w0.254: R17.2@79.891,55.119 v1(80.906,56.134) ; v1@80.715,56.134 cw(c80.255,56.134) 80.581,55.809 cw(c80.906,55.484) v1@80.906,55.944
NetD4_2: D4.2 R18.2 | length 5.9
  Top Layer w0.254: D4.2@79.716,96.23 v1(80.645,95.301) ; D4.2@79.818,95.632 cw(c79.844,94.5) v1(80.645,95.301) ; D4.2@80.314,96.128 ccw(c81.446,96.102) v1(80.645,95.301) ; v1@80.454,95.301 ccw(c79.994,95.301) 80.32,95.626 ccw(c80.645,95.951) v1@80.645,95.491
  Bottom Layer w0.254: R18.2@79.713,96.233 v1(80.645,95.301) ; v1@80.454,95.301 ccw(c79.995,95.301) 80.32,95.626 ccw(c80.645,95.951) v1@80.645,95.491
NetD5_2: D5.2 R19.2 | length 5.4
  Top Layer w0.254: v1@117.551,95.567 ccw(c117.551,96.027) 117.876,95.702 ccw(c118.201,95.377) v1@117.741,95.377 ; D5.2@117.805,96.086 cw(c116.929,96) v1(117.551,95.377) ; D5.2@118.26,95.631 ccw(c118.174,94.755) v1(117.551,95.377) ; D5.2@118.4,96.226 v1(117.551,95.377)
  Bottom Layer w0.254: v1(117.551,95.377) R19.2@118.397,96.223 ; v1@117.551,95.567 ccw(c117.551,96.028) 117.876,95.702 ccw(c118.201,95.377) v1@117.741,95.377